# EAGLE board board_rev3 (EAGLE 4.16)

Size 160 x 100 mm. Coordinates in mm from the lower left corner, seen from the top.
Outline: 0,0 160,0 160,100 0,100 0,0
Copper layers (1*16): Top 0.035mm / dielectric 1.5mm / Bottom 0.035mm
Design rules "default": minimum track width 10mil, minimum drill 24mil, track to track 8mil, track to pad 8mil, pad to pad 8mil, via to via 8mil, smd to smd 8mil, copper to edge 40mil, drill to drill 8mil, minimum pad ring 10mil, minimum via ring 8mil, stop-mask expansion 4mil, vias tented up to drill 0mil, thermal gap 10mil
Net classes: 0 default: width 0.61 mm

## Footprints (pad centres in the part's own frame; a part is rotated, then mirrored left to right if it is on the bottom)
E5-10,5 = drill 1.016 pad 2.54 round: + -2.54,0 | drill 1.016 pad 2.54 octagon: - 2.54,0
C0402 = smd 0.7 x 0.9: 1 -0.65,0; 2 0.65,0
CAP_POLI = drill 0.8 pad 1.93 round: P$1 -5.08,0; P$2 0,0
DO35-10 = drill 0.813 long: A 5.08,0; C -5.08,0
CR2032V = drill 1.321 pad 3.15 octagon: + -2.54,-5.08; +@1 -2.54,5.08; - 2.286,0
FOX = drill 0.8 pad 1.93 round: J6.1 67.31,0; J6.2 69.85,0; J6.3 67.31,-2.54; J6.4 69.85,-2.54; J6.5 67.31,-5.08; J6.6 69.85,-5.08; J6.7 67.31,-7.62; J6.8 69.85,-7.62; J6.9 67.31,-10.16; J6.10 69.85,-10.16; J6.11 67.31,-12.7; J6.12 69.85,-12.7; J6.13 67.31,-15.24; J6.14 69.85,-15.24; J6.15 67.31,-17.78; J6.16 69.85,-17.78; J6.17 67.31,-20.32; J6.18 69.85,-20.32; J6.19 67.31,-22.86; J6.20 69.85,-22.86; J6.21 67.31,-25.4; J6.22 69.85,-25.4; J6.23 67.31,-27.94; J6.24 69.85,-27.94; J6.25 67.31,-30.48; J6.26 69.85,-30.48; J6.27 67.31,-33.02; J6.28 69.85,-33.02; J6.29 67.31,-35.56; J6.30 69.85,-35.56; J6.31 67.31,-38.1; J6.32 69.85,-38.1; J6.33 67.31,-40.64; J6.34 69.85,-40.64; J6.35 67.31,-43.18; J6.36 69.85,-43.18; J6.37 67.31,-45.72; J6.38 69.85,-45.72; J6.39 67.31,-48.26; J6.40 69.85,-48.26; J7.1 0,0; J7.2 2.54,0; J7.3 0,-2.54; J7.4 2.54,-2.54; J7.5 0,-5.08; J7.6 2.54,-5.08; J7.7 0,-7.62; J7.8 2.54,-7.62; J7.9 0,-10.16; J7.10 2.54,-10.16; J7.11 0,-12.7; J7.12 2.54,-12.7; J7.13 0,-15.24; J7.14 2.54,-15.24; J7.15 0,-17.78; J7.16 2.54,-17.78; J7.17 0,-20.32; J7.18 2.54,-20.32; J7.19 0,-22.86; J7.20 2.54,-22.86; J7.21 0,-25.4; J7.22 2.54,-25.4; J7.23 0,-27.94; J7.24 2.54,-27.94; J7.25 0,-30.48; J7.26 2.54,-30.48; J7.27 0,-33.02; J7.28 2.54,-33.02; J7.29 0,-35.56; J7.30 2.54,-35.56; J7.31 0,-38.1; J7.32 2.54,-38.1; J7.33 0,-40.64; J7.34 2.54,-40.64; J7.35 0,-43.18; J7.36 2.54,-43.18; J7.37 0,-45.72; J7.38 2.54,-45.72; J7.39 0,-48.26; J7.40 2.54,-48.26
DIL08 = drill 0.813 long: 1 -3.81,-3.81; 2 -1.27,-3.81; 3 1.27,-3.81; 4 3.81,-3.81; 5 3.81,3.81; 6 1.27,3.81; 7 -1.27,3.81; 8 -3.81,3.81
DIL14 = drill 0.813 long: 1 -7.62,-3.81; 2 -5.08,-3.81; 3 -2.54,-3.81; 4 0,-3.81; 5 2.54,-3.81; 6 5.08,-3.81; 7 7.62,-3.81; 8 7.62,3.81; 9 5.08,3.81; 10 2.54,3.81; 11 0,3.81; 12 -2.54,3.81; 13 -5.08,3.81; 14 -7.62,3.81
ADT7318SMD = smd 0.635 x 1.27: 1 -10.16,-1.27; 2 -8.89,-1.27; 3 -7.62,-1.27; 4 -6.35,-1.27; 5 -5.08,-1.27; 6 -3.81,-1.27; 7 -2.54,-1.27; 8 -1.27,-1.27; 9 -1.27,3.81; 10 -2.54,3.81; 11 -3.81,3.81; 12 -5.08,3.81; 13 -6.35,3.81; 14 -7.62,3.81; 15 -8.89,3.81; 16 -10.16,3.81
DS1307 = drill 0.8 long: 1 -8.89,-5.08; 2 -6.35,-5.08; 3 -3.81,-5.08; 4 -1.27,-5.08; 5 -1.27,2.54; 6 -3.81,2.54; 7 -6.35,2.54; 8 -8.89,2.54
TO92-EBC = drill 0.813 long: B 0,-1.27; C -2.54,-1.27; E 2.54,-1.27
TO126AV = drill 1.016 long: B 2.286,-1.27; C 0,-1.27; E -2.286,-1.27
Q = drill 0.61 long: 1 -2.54,-7.62; 2 2.54,-7.62
0207/10 = drill 0.813 octagon: 1 -5.08,0; 2 5.08,0
LI10 = drill 1.321 octagon: A -2.54,-5.08; E 2.54,-5.08; S 0,5.08
0411/15 = drill 0.914 octagon: 1 -7.62,0; 2 7.62,0
0411V = drill 0.914 octagon: 1 -2.54,0; 2 1.27,0
F/CM12P = drill 1.016 pad 2.54 octagon: + 3.81,0; - -3.81,0
MA03-2 = drill 1.016 round: 1 -2.54,-1.27 | drill 1.016 octagon: 2 -2.54,1.27; 3 0,-1.27; 4 0,1.27; 5 2.54,-1.27; 6 2.54,1.27
MA06-1 = drill 1.016 long: 1 -6.35,0; 2 -3.81,0; 3 -1.27,0; 4 1.27,0; 5 3.81,0; 6 6.35,0
MA03-1 = drill 1.016 long: 1 -2.54,0; 2 0,0; 3 2.54,0
MAX3232 = smd 0.635 x 1.27: 1 0,-2.54; 2 1.27,-2.54; 3 2.54,-2.54; 4 3.81,-2.54; 5 5.08,-2.54; 6 6.35,-2.54; 7 7.62,-2.54; 8 8.89,-2.54; 9 8.89,2.54; 10 7.62,2.54; 11 6.35,2.54; 12 5.08,2.54; 13 3.81,2.54; 14 2.54,2.54; 15 1.27,2.54; 16 0,2.54
MCP3421 = smd 0.635 x 1.27: 1 -0.953,-1.27; 2 0,-1.27; 3 0.953,-1.27; 4 0.953,1.27; 5 0,1.27; 6 -0.953,1.27
MAX6032 = smd 1.27 x 2.54: 1 0,-2.54; 2 1.905,-2.54; 3 3.81,-2.54; 4 5.715,-2.54; 5 5.715,2.54; 6 3.81,2.54; 7 1.905,2.54; 8 0,2.54
MCP23008_DHT = drill 0.8 long: P$1 0,0; P$2 2.54,0; P$3 5.08,0; P$4 7.62,0; P$5 10.16,0; P$6 12.7,0; P$7 15.24,0; P$8 17.78,0; P$9 20.32,0; P$10 20.32,7.62; P$11 17.78,7.62; P$12 15.24,7.62; P$13 12.7,7.62; P$14 10.16,7.62; P$15 7.62,7.62; P$16 5.08,7.62; P$17 2.54,7.62; P$18 0,7.62
22-23-2041 = drill 0.813 long: 1 -3.81,0; 2 -1.27,0; 3 1.27,0; 4 3.81,0
F09H = drill 1.016 octagon: 1 -5.486,-1.27; 2 -2.743,-1.27; 3 0,-1.27; 4 2.743,-1.27; 5 5.486,-1.27; 6 -4.115,1.27; 7 -1.372,1.27; 8 1.372,1.27; 9 4.115,1.27 | hole 3.302: -12.522,0; 12.522,0

## Placement (x,y rotation side)
C1  470uF  [E5-10,5]  -160.66,113.5 0 top  (outside the outline)
C2  470uF  [E5-10,5]  -178.44,113.5 0 top  (outside the outline)
C3  100nF  [C0402]  -29.85,168.11 0 top  (outside the outline)
C4  100nF  [C0402]  -224.16,160.49 0 top  (outside the outline)
C5  100nF  [C0402]  -19.69,168.11 0 top  (outside the outline)
C6  100nF  [C0402]  -40.01,168.11 0 top  (outside the outline)
C7  100nF  [C0402]  -214,160.49 0 top  (outside the outline)
C8  100nF  [C0402]  -203.84,160.49 0 top  (outside the outline)
C9  100nF  [C0402]  -193.68,160.49 0 top  (outside the outline)
C10  100nF  [C0402]  -183.52,160.49 0 top  (outside the outline)
C11  47nF  [CAP_POLI]  -104.78,114.77 0 top  (outside the outline)
C12  100nF  [C0402]  -173.36,160.49 0 top  (outside the outline)
C13  100nF  [C0402]  -163.2,160.49 0 top  (outside the outline)
C14  47nF  [CAP_POLI]  -122.56,114.77 0 top  (outside the outline)
C15  100nF  [C0402]  -153.04,160.49 0 top  (outside the outline)
C16  100nF  [C0402]  -142.88,160.49 0 top  (outside the outline)
D1  1N4148  [DO35-10]  -60.33,145.25 0 top  (outside the outline)
G1  CR2032V  [CR2032V]  -132.72,10.63 0 top  (outside the outline)
IC1  FOX  [FOX]  -88.27,66.51 0 top  (outside the outline)
IC2  MAX412CPA  [DIL08]  -177.17,10.63 0 top  (outside the outline)
IC3  LF347N  [DIL14]  -153.04,10.63 0 top  (outside the outline)
IC4  ADT7316SMD  [ADT7318SMD]  -43.82,113.5 0 top  (outside the outline)
IC5  DS1307  [DS1307]  -17.15,99.53 0 top  (outside the outline)
Q1  BC548  [TO92-EBC]  -79.38,136.36 0 top  (outside the outline)
Q2  BD438  [TO126AV]  -196.22,128.74 0 top  (outside the outline)
Q3  32,768Khz  [Q]  -205.11,98.26 0 top  (outside the outline)
R1  2k2  [0207/10]  -92.08,160.49 0 top  (outside the outline)
R2  2k2  [0207/10]  -109.86,160.49 0 top  (outside the outline)
R3  2k2  [0207/10]  -127.64,160.49 0 top  (outside the outline)
R4  1K  [0207/10]  -78.11,145.25 0 top  (outside the outline)
R5  1K  [0207/10]  -95.89,145.25 0 top  (outside the outline)
R6  10k  [LI10]  -122.56,96.99 0 top  (outside the outline)
R7  [0207/10]  -131.45,145.25 0 top  (outside the outline)
R8  [0207/10]  -113.67,145.25 0 top  (outside the outline)
R9  [LI10]  -38.74,96.99 0 top  (outside the outline)
R10  10k  [LI10]  -136.53,96.99 0 top  (outside the outline)
R11  [0207/10]  -202.57,145.25 0 top  (outside the outline)
R12  [0207/10]  -184.79,145.25 0 top  (outside the outline)
R13  [LI10]  -52.71,96.99 0 top  (outside the outline)
R14  100k 1%  [0411/15]  -120.02,135.09 0 top  (outside the outline)
R15  5k 1%  [0411/15]  -97.16,135.09 0 top  (outside the outline)
R16  5k 1%  [0207/10]  -149.23,145.25 0 top  (outside the outline)
R17  100k 1%  [0207/10]  -20.96,152.87 0 top  (outside the outline)
R18  5k 1%  [0207/10]  -56.52,152.87 0 top  (outside the outline)
R19  100k 1%  [0207/10]  -92.08,152.87 0 top  (outside the outline)
R20  1K  [0207/10]  -127.64,152.87 0 top  (outside the outline)
R21  5k 1%  [0207/10]  -167.01,145.25 0 top  (outside the outline)
R22  100k 1%  [0207/10]  -38.74,152.87 0 top  (outside the outline)
R23  5k 1%  [0207/10]  -74.3,152.87 0 top  (outside the outline)
R24  100k 1%  [0207/10]  -109.86,152.87 0 top  (outside the outline)
R25  100k 1%  [0411/15]  -165.74,135.09 0 top  (outside the outline)
R26  1K  [0207/10]  -145.42,152.87 0 top  (outside the outline)
R27  5k 1%  [0411/15]  -142.88,135.09 0 top  (outside the outline)
R28  10k  [LI10]  -192.41,96.99 0 top  (outside the outline)
R29  10k  [0207/10]  -180.98,152.87 0 top  (outside the outline)
R30  10k  [0207/10]  -163.2,152.87 0 top  (outside the outline)
R31  10k  [0411V]  -45.09,145.25 0 top  (outside the outline)
R32  47k  [LI10]  -66.68,96.99 0 top  (outside the outline)
R33  10k  [LI10]  -178.44,96.99 0 top  (outside the outline)
R34  10k  [0207/10]  -198.76,152.87 0 top  (outside the outline)
R35  10k  [0411V]  -216.54,135.09 0 top  (outside the outline)
R36  47k  [LI10]  -80.65,96.99 0 top  (outside the outline)
R37  10k  [0207/10]  -216.54,152.87 0 top  (outside the outline)
R38  10k  [LI10]  -164.47,96.99 0 top  (outside the outline)
R39  10k  [0207/10]  -20.96,160.49 0 top  (outside the outline)
R40  10k  [0411V]  -19.69,145.25 0 top  (outside the outline)
R41  47k  [LI10]  -94.62,96.99 0 top  (outside the outline)
R42  10k  [0207/10]  -38.74,160.49 0 top  (outside the outline)
R43  10k  [LI10]  -150.5,96.99 0 top  (outside the outline)
R44  10k  [0207/10]  -56.52,160.49 0 top  (outside the outline)
R45  10k  [0207/10]  -74.3,160.49 0 top  (outside the outline)
R46  10k  [0411V]  -32.39,145.25 0 top  (outside the outline)
R47  47k  [LI10]  -108.59,96.99 0 top  (outside the outline)
SG1  F/CM12P  [F/CM12P]  -220.35,94.45 0 top  (outside the outline)
SV1  [MA03-2]  -191.14,113.5 0 top  (outside the outline)
SV2  [MA03-2]  -170.82,126.2 0 top  (outside the outline)
SV3  [MA06-1]  -187.33,135.09 0 top  (outside the outline)
SV4  [MA03-2]  -94.62,126.2 0 top  (outside the outline)
SV5  [MA03-2]  -203.84,113.5 0 top  (outside the outline)
SV6  [MA03-2]  -216.54,113.5 0 top  (outside the outline)
SV7  [MA03-2]  -18.42,126.2 0 top  (outside the outline)
SV8  [MA03-2]  -31.12,126.2 0 top  (outside the outline)
SV9  [MA03-2]  -158.12,126.2 0 top  (outside the outline)
SV10  [MA03-2]  -145.42,126.2 0 top  (outside the outline)
SV11  [MA03-2]  -43.82,126.2 0 top  (outside the outline)
SV12  [MA03-2]  -132.72,126.2 0 top  (outside the outline)
SV13  [MA03-2]  -120.02,126.2 0 top  (outside the outline)
SV14  [MA03-1]  -203.84,135.09 0 top  (outside the outline)
SV15  [MA03-2]  -56.52,126.2 0 top  (outside the outline)
SV16  [MA03-2]  -107.32,126.2 0 top  (outside the outline)
SV17  [MA03-2]  -69.22,126.2 0 top  (outside the outline)
SV18  [MA03-2]  -183.52,126.2 0 top  (outside the outline)
SV19  [MA03-2]  -81.92,126.2 0 top  (outside the outline)
U$1  MAX3232  [MAX3232]  -146.69,114.77 0 top  (outside the outline)
U$2  MCP3421  [MCP3421]  -208.92,126.2 0 top  (outside the outline)
U$3  MCP3421  [MCP3421]  -219.08,126.2 0 top  (outside the outline)
U$4  MAX6032  [MAX6032]  -22.23,114.77 0 top  (outside the outline)
U$5  MCP3421  [MCP3421]  -18.42,136.36 0 top  (outside the outline)
U$6  MAX6032  [MAX6032]  -36.2,114.77 0 top  (outside the outline)
U$7  MCP3421  [MCP3421]  -28.58,136.36 0 top  (outside the outline)
U$8  MCP23008_DHT  [MCP23008_DHT]  -214,6.82 0 top  (outside the outline)
U$9  MCP3421  [MCP3421]  -38.74,136.36 0 top  (outside the outline)
U$10  MCP3421  [MCP3421]  -48.9,136.36 0 top  (outside the outline)
U$11  MCP3421  [MCP3421]  -69.22,136.36 0 top  (outside the outline)
U$12  MCP3421  [MCP3421]  -59.06,136.36 0 top  (outside the outline)
X1  22-23-2041  [22-23-2041]  -88.27,114.77 0 top  (outside the outline)
X2  22-23-2041  [22-23-2041]  -67.95,114.77 0 top  (outside the outline)
X3  [F09H]  -109.86,8.09 0 top  (outside the outline)

## Library data of the parts
C1-C10 C12 C13 C15 C16 R1-R5 R7 R8 R11 R12 R14-R27 R29-R31 R34 R35 R37 R39 R40 R42 R44-R46 = rcl
C11 C14 IC1 IC4 IC5 U$1-U$12 = aggiunte
D1 = diode
G1 = battery
IC2 = maxim
IC3 = linear
Q1 = transistor-npn
Q2 = transistor-power
Q3 = special
R6 R9 R10 R13 R28 R32 R33 R36 R38 R41 R43 R47 = pot
SG1 = buzzer
SV1-SV19 = con-lstb
X1 X2 = con-molex
X3 = con-subd

## Nets
5V: SV2.5 SV4.5 SV5.5 SV6.5 SV7.4 SV7.5 SV8.5 SV9.5 SV10.5 SV11.5 SV12.5 SV13.5 SV15.5 SV16.5 SV17.5 SV18.5 SV19.5 U$8.P$6 U$8.P$18
+3V3: SV3.6 U$1.16
+5V: C1.+ C11.P$1 C14.P$1 IC2.8 IC3.4 IC5.8 R1.2 R2.2 R3.2 R4.1 R5.1 R6.E R10.E R16.1 R23.1 R28.E R33.E R38.E R43.E SG1.+ SV14.3 U$4.8 U$6.8 X2.1
+12V: C2.+ Q2.E SV10.4 SV12.4 SV13.4 SV14.1 X1.2
-5V: R6.A R10.A R28.A R33.A R38.A R43.A
CH0: IC3.14 R47.S U$12.1
CH1: IC3.8 R41.S U$11.1
CH2: IC3.7 R36.S U$10.1
CH3: IC3.1 R32.S U$9.1
GND: C1.- C2.- C4.2 C5.2 C7.2 C8.2 C9.2 C10.2 C11.P$2 C12.2 C13.2 C14.P$2 C15.2 C16.2 G1.- IC2.3 IC2.5 IC3.3 IC3.5 IC3.10 IC3.12 IC4.4 IC4.5 IC5.4 Q1.E R18.1 R21.1 SV2.1 SV3.1 SV4.1 SV5.1 SV6.1 SV9.1 SV10.1 SV11.1 SV12.1 SV13.1 SV15.1 SV16.1 SV17.1 SV18.1 SV19.1 U$1.15 U$2.2 U$2.6 U$3.2 U$3.6 U$4.4 U$5.2 U$5.6 U$6.4 U$7.2 U$7.6 U$8.P$3 U$8.P$5 U$8.P$9 U$9.2 U$9.6 U$10.2 U$10.6 U$11.2 U$11.6 U$12.2 U$12.6 X1.3 X2.2 X2.3 X3.5
N$1: R20.1 U$8.P$10
N$2: R17.2 R22.2 U$4.7
N$3: R19.2 R24.2 U$6.7
N$4: D1.C IC5.3
N$5: R25.1 R27.2
N$6: R14.1 R15.2
N$7: SV8.4
N$8: R21.2 R22.1
N$9: IC2.1 R9.S U$2.1
N$10: IC2.7 R13.S U$3.1
N$11: SV18.3 U$8.P$15
N$12: D1.A G1.+
N$13: R14.2 U$4.1 U$5.1
N$14: Q2.B R26.2
N$16: R26.1 U$8.P$11
N$17: IC4.16 SV13.3
N$18: SV16.3 U$8.P$14
N$19: Q2.C SV9.3
N$20: Q1.C SG1.-
N$21: IC4.3 IC4.6 IC4.14 SV14.2
N$22: R25.2 U$6.1 U$7.1
N$23: IC4.2 SV10.3
N$25: IC4.9 U$8.P$17
N$26: Q1.B R20.2
N$27: C3.2 U$1.1
N$28: R18.2 R19.1
N$29: R16.2 R17.1 SV7.1
N$30: R35.2 R36.E
N$31: R10.S R11.1
N$32: R23.2 R24.1 SV8.1
N$33: R40.2 R41.E
N$34: R46.2 R47.E
N$35: R31.2 R32.E
N$36: U$1.14 X3.3
N$37: R15.1 SV7.3
N$38: R27.1 SV8.3
N$39: C6.2 U$1.4
N$40: U$1.13 X3.2
N$41: C5.1 U$1.6
N$42: C3.1 U$1.3
N$43: C4.1 U$1.2
N$44: C6.1 U$1.5
N$45: U$1.8 X3.8
N$46: U$1.7 X3.7
N$47: R2.1 X3.1
N$48: R1.1 X3.4
N$49: R3.1 X3.6
N$50: IC4.1 SV12.3
N$51: IC1.J6.2
N$52: IC1.J6.1
N$55: SV3.4 U$1.11
N$56: SV3.3 U$1.12
N$57: SV3.5 U$1.10
N$58: IC2.2 R7.2 R8.2 R9.E
N$59: SV3.2 U$1.9
N$60: R8.1 SV5.3
N$62: R6.S R7.1
N$63: IC2.6 R11.2 R12.2 R13.E
N$69: R12.1 SV6.3
N$83: IC5.1 Q3.1
N$84: IC5.2 Q3.2
N$113: IC3.2 R29.2 R30.2 R31.1
N$114: IC3.6 R34.2 R35.1 R37.2
N$115: IC3.9 R39.2 R40.1 R42.2
N$116: IC3.13 R44.2 R45.2 R46.1
N$117: R45.1 SV19.3
N$119: R42.1 SV17.3
N$121: R43.S R44.1
N$122: R38.S R39.1
N$123: R33.S R34.1
N$124: R37.1 SV15.3
N$125: R30.1
N$126: R28.S R29.1
SCL: IC1.J7.13 IC4.13 IC5.6 R5.2 SV2.2 SV4.2 SV5.2 SV6.2 SV7.2 SV8.2 SV9.2 SV10.2 SV11.2 SV12.2 SV13.2 SV15.2 SV16.2 SV17.2 SV18.2 SV19.2 U$2.3 U$3.3 U$5.3 U$7.3 U$8.P$1 U$9.3 U$10.3 U$11.3 U$12.3
SDA: IC1.J7.21 IC4.12 IC5.5 R4.2 SV2.6 SV4.6 SV5.6 SV6.6 SV7.6 SV8.6 SV9.6 SV10.6 SV11.6 SV12.6 SV13.6 SV15.6 SV16.6 SV17.6 SV18.6 SV19.6 U$2.4 U$3.4 U$5.4 U$7.4 U$8.P$2 U$9.4 U$10.4 U$11.4 U$12.4
V-: IC2.4 IC3.11 X1.4
VCC: C7.1 C8.1 C9.1 C10.1 C12.1 C13.1 C15.1 C16.1 U$2.5 U$3.5 U$5.5 U$7.5 U$9.5 U$10.5 U$11.5 U$12.5

## Tracks (layer width: path | path; a pad name or v marks a point on that pad's centre or on a via)
5V  (18 unrouted)
+3V3  (1 unrouted)
+5V  (23 unrouted)
+12V  (6 unrouted)
-5V  (5 unrouted)
CH0  (2 unrouted)
CH1  (2 unrouted)
CH2  (2 unrouted)
CH3  (2 unrouted)
GND  (67 unrouted)
N$1  (1 unrouted)
N$2  (2 unrouted)
N$3  (2 unrouted)
N$4  (1 unrouted)
N$5  (1 unrouted)
N$6  (1 unrouted)
N$8  (1 unrouted)
N$9  (2 unrouted)
N$10  (2 unrouted)
N$11  (1 unrouted)
N$12  (1 unrouted)
N$13  (2 unrouted)
N$14  (1 unrouted)
N$16  (1 unrouted)
N$17  (1 unrouted)
N$18  (1 unrouted)
N$19  (1 unrouted)
N$20  (1 unrouted)
N$21  (3 unrouted)
N$22  (2 unrouted)
N$23  (1 unrouted)
N$25  (1 unrouted)
N$26  (1 unrouted)
N$27  (1 unrouted)
N$28  (1 unrouted)
N$29  (2 unrouted)
N$30  (1 unrouted)
N$31  (1 unrouted)
N$32  (2 unrouted)
N$33  (1 unrouted)
N$34  (1 unrouted)
N$35  (1 unrouted)
N$36  (1 unrouted)
N$37  (1 unrouted)
N$38  (1 unrouted)
N$39  (1 unrouted)
N$40  (1 unrouted)
N$41  (1 unrouted)
N$42  (1 unrouted)
N$43  (1 unrouted)
N$44  (1 unrouted)
N$45  (1 unrouted)
N$46  (1 unrouted)
N$47  (1 unrouted)
N$48  (1 unrouted)
N$49  (1 unrouted)
N$50  (1 unrouted)
N$55  (1 unrouted)
N$56  (1 unrouted)
N$57  (1 unrouted)
N$58  (3 unrouted)
N$59  (1 unrouted)
N$60  (1 unrouted)
N$62  (1 unrouted)
N$63  (3 unrouted)
N$69  (1 unrouted)
N$83  (1 unrouted)
N$84  (1 unrouted)
N$113  (3 unrouted)
N$114  (3 unrouted)
N$115  (3 unrouted)
N$116  (3 unrouted)
N$117  (1 unrouted)
N$119  (1 unrouted)
N$121  (1 unrouted)
N$122  (1 unrouted)
N$123  (1 unrouted)
N$124  (1 unrouted)
N$126  (1 unrouted)
SCL  (28 unrouted)
SDA  (28 unrouted)
V-  (2 unrouted)
VCC  (15 unrouted)